# EAGLE board SCA3100-D04 Breakout (EAGLE 8.4.1)
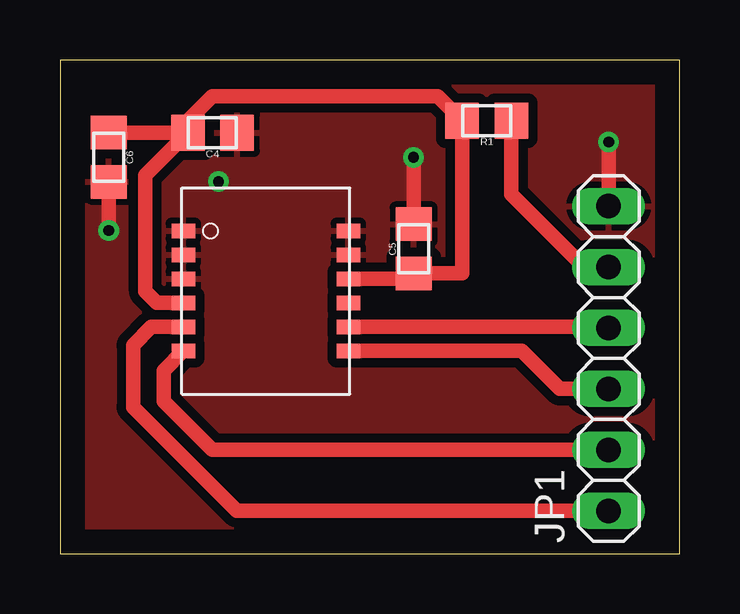
[diagram p0: board, top side]
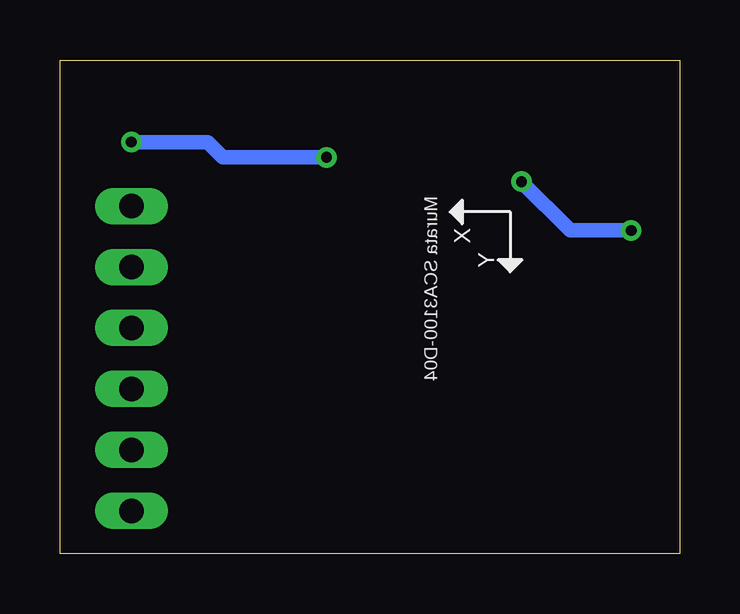
[diagram p1: board, bottom side, seen from below]

Size 25.83 x 20.56 mm. Coordinates in mm from the lower left corner, seen from the top.
Outline: 0,0 25.83,0 25.83,20.56 0,20.56 0,0
Copper layers (1*16): Top 0.035mm / dielectric 1.5mm / Bottom 0.035mm
Design rules "default *": minimum track width 6mil, minimum drill 0.35mm, track to track 15mil, track to pad 15mil, pad to pad 15mil, via to via 15mil, smd to smd 15mil, copper to edge 40mil, drill to drill 6mil, minimum pad ring 10mil, minimum via ring 8mil, stop-mask expansion 4mil, vias tented up to drill 0mil, thermal gap 10mil

## Footprints (pad centres in the part's own frame; a part is rotated, then mirrored left to right if it is on the bottom)
0805 = smd 1.4 x 1.5: 1 -1.025,0; 2 1.025,0
1X06 = drill 1.016 long: 1 -6.35,0; 2 -3.81,0; 3 -1.27,0; 4 1.27,0; 5 3.81,0; 6 6.35,0
SCA3100-D04 = smd 0.98 x 0.61: AVDD 0.06,-4.8; AVSS 0.06,-3.8; CSB 0.06,-5.8; DVDD 6.94,-3.8; DVSS 6.94,-2.8; EGND 6.94,-1.8; MISO 0.06,-6.8; MOSI 6.94,-5.8; NC1 0.06,-1.8; NC2 0.06,-2.8; PWM 6.94,-4.8; SCK 6.94,-6.8

## Placement (x,y rotation side)
C4  100 nF  [0805]  6.35,17.53 180 top
C5  100 nF  [0805]  14.73,12.7 90 top
C6  10 uF  [0805]  2.03,16.51 270 top
JP1  [1X06]  22.86,8.13 90 top
R1  10 ohm  [0805]  17.78,18.03 180 top
U$1  SCA3100-D04  [SCA3100-D04]  5.08,15.24 0 top

## Library data of the parts
C4-C6 JP1 R1 U$1 = HyTechDevices

## Nets
CSB: JP1.1 U$1.CSB
GND: C4.1 C5.2 C6.2 JP1.6 U$1.AVSS U$1.DVSS U$1.EGND U$1.NC1 U$1.NC2
MISO: JP1.2 U$1.MISO
MOSI: JP1.4 U$1.MOSI
N$4: C4.2 C5.1 C6.1 R1.2 U$1.AVDD U$1.DVDD
SCK: JP1.3 U$1.SCK
VDD: JP1.5 R1.1

## Tracks (layer width: path | path; a pad name or v marks a point on that pad's centre or on a via)
CSB
  Top 0.61: U$1.CSB 3.81,9.44 3.05,8.68 3.05,6.1 7.37,1.78 JP1.1
GND  (via drill 0.45)
  Top 0.61: C5.2 v14.73,16.51 | JP1.6 v22.86,17.15 | C6.2 v2.03,13.46
  Bottom 0.61: v14.73,16.51 19.05,16.51 19.68,17.15 v22.86,17.15 | v2.03,13.46 4.57,13.46 v6.6,15.49
  pour Top: 0.25,20.32 25.65,20.32 25.65,0.25 0.25,0.25
MISO
  Top 0.61: U$1.MISO 4.32,7.62 4.32,6.35 6.35,4.32 JP1.2
MOSI
  Top 0.61: U$1.MOSI 22.86,9.44 JP1.4
N$4
  Top 0.61: C6.1 C4.2 | U$1.DVDD 14.73,11.44 C5.1 16.75,11.67 R1.2 15.74,19.05 6.35,19.05 5.32,18.02 C4.2 | C4.2 3.56,15.76 3.56,10.92 4.04,10.44 U$1.AVDD
SCK
  Top 0.61: JP1.3 20.83,6.86 19.25,8.44 U$1.SCK
VDD
  Top 0.61: JP1.5 21.84,11.94 18.8,14.98 R1.1